# Altium PCB HallSensor.PcbDoc
Units mil, origin at the board's own origin, x right, y up, seen from the top; angles counter-clockwise.
Board outline 480 x 375 mil, 2 copper layers (Top Layer, Bottom Layer); 3 components, 3 nets, 17 pads, 1 vias.
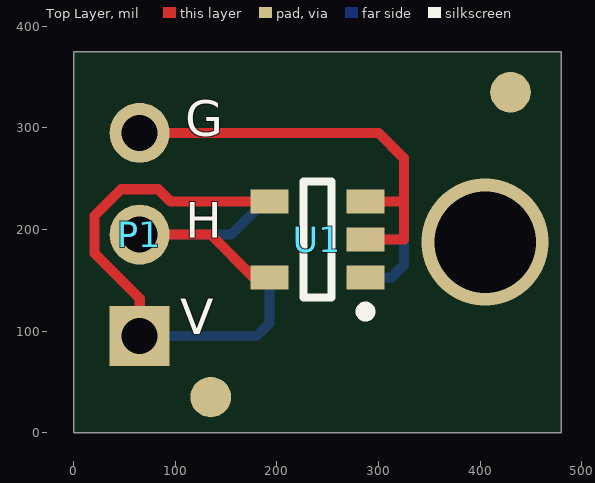
[diagram p0: Top Layer view]
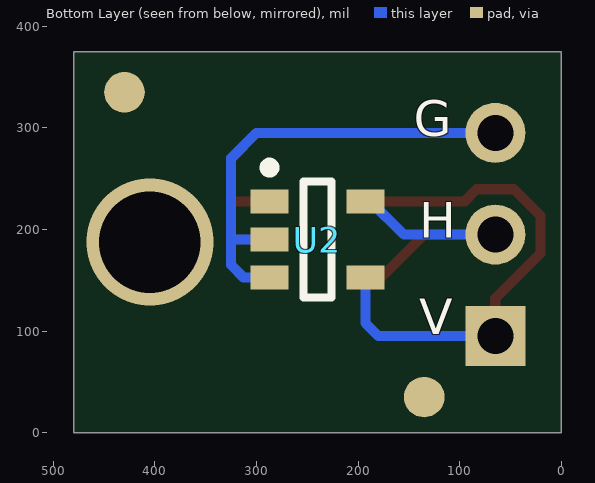
[diagram p1: Bottom Layer view, seen from below]

## Layer stack, top to bottom
Top Solder: solder mask 0.4, Solder Resist, Dk 3.5
Top Layer: signal copper 1.4
Dielectric 1: dielectric 12.6, FR-4, Dk 4.8
Bottom Layer: signal copper 1.4
Bottom Solder: solder mask 0.4, Solder Resist, Dk 3.5

## Board outline
0,0 0,375 480,375 480,0

## Design rules (kind name [scope] priority, off if disabled: settings)
Clearance [All] p1: gap=10
PolygonConnect [All] p1: connectstyle=Relief reliefconductorwidth=10 reliefentries=4 polygonreliefangle="90 Angle" airgapwidth=10
RoutingVias [All] p1: holewidth=28 width=50 viastyle="Through Hole" minholewidth=28 minwidth=50 maxholewidth=28 maxwidth=50
SolderMaskExpansion [All] p1: expansion=4
Width [All] p1: maxlimit=10 minlimit=10 preferedwidth=10
29 further rules are at their usual default settings.

## Components (designator, comment, footprint, x,y, rotation, side; value= is the part's Value field where it differs from the comment)
P1 "Header 3" HDR1X3 65,95 r90 top
U1 "si720x" Hall_si720x 240,190 r180 top
U2 "si720x" Hall_si720x 240,190 r180 bottom

## Footprints (in the part's own frame and the unit in brackets; to place one, negate y for a bottom-side part, rotate by r counter-clockwise, add the part's x,y. Pads: shape width x height; smd on the part's side, far side on the other; paste and mask are expansions set on the pad)
Hall_si720x [mm] "SOT23, 5-Leads, Body 2.90x2.75mm, Pitch 0.95mm, IPC Medium Density"
  rect 0.95x0.6 smd: 1(-1.2,0.95) 2(-1.2,0) 3(-1.2,-0.95) 4(1.2,-0.95) 5(1.2,0.95)
  silkscreen extent -1.33,-1.45 0.35,1.92, body extent -0.8,-1.45 0.8,1.45, height 1.25
HDR1X3 [mm] "Connector; Header; 3 Position"
  rect 1.5x1.5 hole 0.9: 1(0,0)
  round 1.5 hole 0.9: 2(2.54,0) 3(5.08,0)

## Part data
P1: "Header, 3-Pin"
U1 U2: library part Hall_si720x, "Hall Sensor"

## Free pads (board coordinates)
  round 40 smd paste-20 mask+5: 0(135,35) 0(430,335)
  round 40 smd far side paste-20 mask+5: 0(135,35) 0(430,335)

## Via types
v1: diameter 125, hole 100, Top Layer to Bottom Layer, 1 vias

## Nets (pads, with @x,y where several pads share a name; then routed paths per layer and width w, separated by ;. In a path a pad name is that pad's centre, name@x,y a point inside that pad or via, vN(x,y) a via of type N, cw(c..) or ccw(c..) an arc to the next point about the centre after c; other vN are vias at no path point)
GND: P1.3 U1.2 U1.3 U2.2 U2.3 | length 882.9
  Top Layer w10: P1.3 300,295 325,270 325,225 ; U1.2 325,190 325,225 ; U1.3 322.6,227.4 325,225
  Bottom Layer w10: P1.3 300,295 325,270 325,190 ; U2.3 312.6,152.6 325,165 325,190 ; U2.2 325,190
HALL: P1.2 U1.5 U2.5 | length 286.5
  Top Layer w10: P1.2 135,195 177.4,152.6 U1.5
  Bottom Layer w10: P1.2 155,195 187.4,227.4 U2.5
VCC: P1.1 U1.4 U2.4 | length 502.9
  Top Layer w10: P1.1 65,132.03 20.47,176.56 20.47,213.44 46.56,239.53 83.44,239.53 95.57,227.4 U1.4
  Bottom Layer w10: P1.1 180,95 192.76,107.76 U2.4
pads on no net: U1.1 U2.1
copper on no net:
  other v1: 405,187.5

## Silkscreen, mask and mechanical layers (free items; w line width, h text height)
Top Overlay:
  text "G" at 110,280 h60
  text "H" at 110,180 h60
  text "V" at 105,85 h60
Bottom Overlay:
  text "G" at 145,280 h60
  text "H" at 140,180 h60
  text "V" at 140,85 h60
Mechanical 1:
  the board outline again, w10